# Altium PCB STM32L4雷达LoRa.PcbDoc
Units mil, origin at the board's own origin, x right, y up, seen from the top; angles counter-clockwise.
Board outline 6000 x 4000 mil, 2 copper layers (Top Layer, Bottom Layer); 58 components, 33 nets, 319 pads, 42 vias.
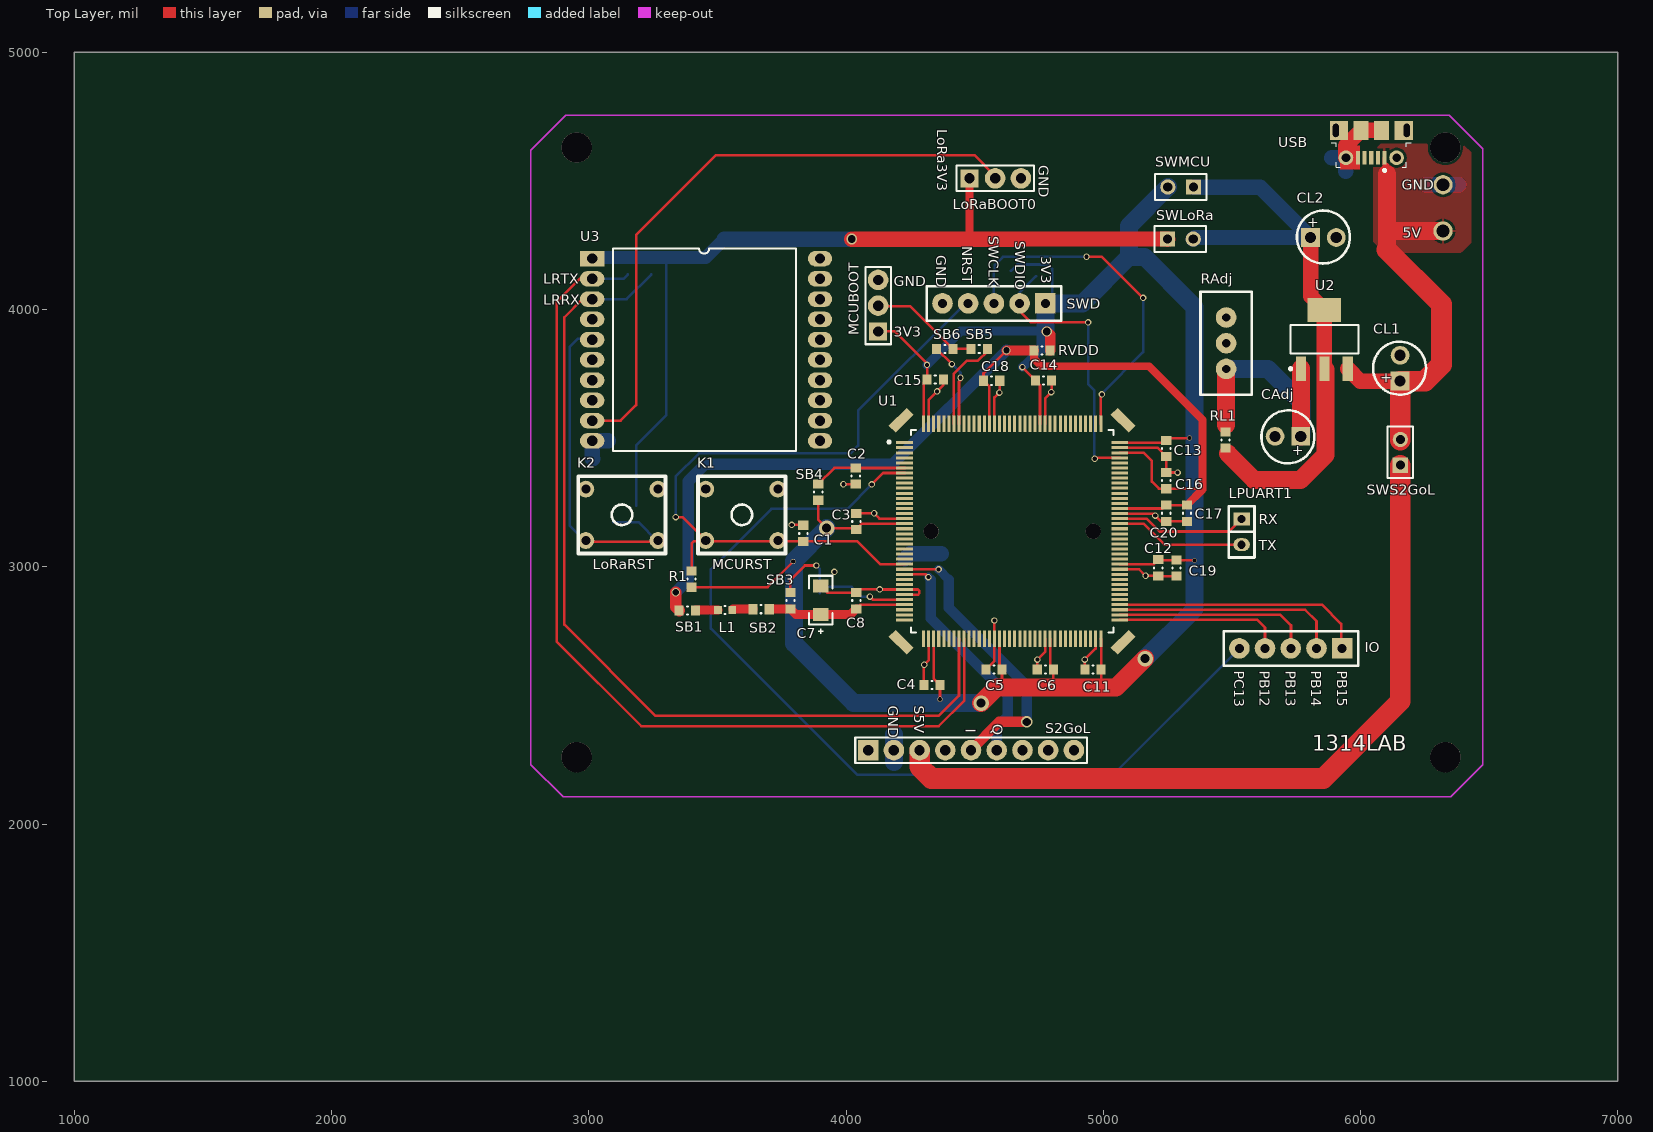
[diagram p0: Top Layer view]
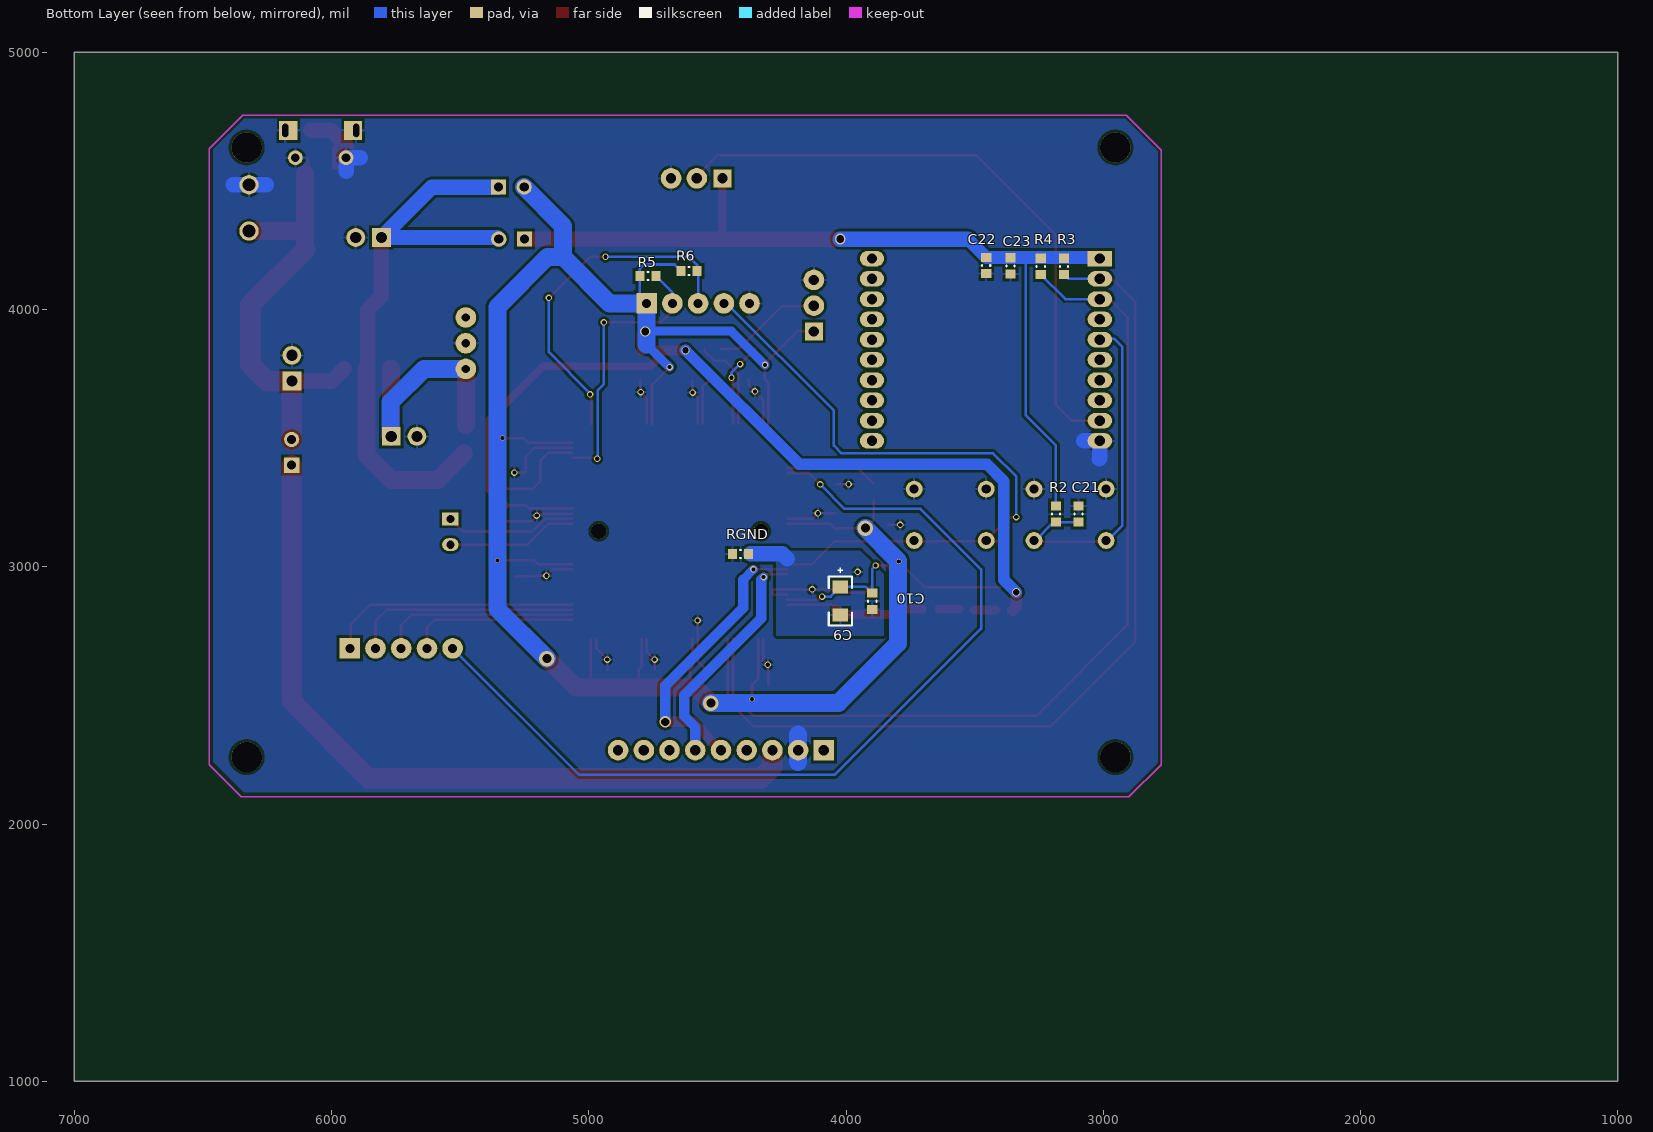
[diagram p1: Bottom Layer view, seen from below]

## Layer stack, top to bottom
Top Layer: signal copper 1.4
Dielectric: dielectric 12.6, FR-4, Dk 4.8
Bottom Layer: signal copper 1.4

## Board outline
1000,1000 7000,1000 7000,5000 1000,5000

## Design rules (kind name [scope] priority, off if disabled: settings)
Clearance [All] p1: gap=10
PolygonConnect [All] p1: connectstyle=Relief reliefconductorwidth=10 reliefentries=4 polygonreliefangle="90 Angle" airgapwidth=10
RoutingVias [All] p1: holewidth=16 width=20 viastyle="Through Hole" minholewidth=15 minwidth=19 maxholewidth=45 maxwidth=60
SolderMaskExpansion [All] p1: expansion=4
Width [All] p1: maxlimit=100 minlimit=10 preferedwidth=10 minimp=50.000000 maximp=50.000000 favimp=50.000000
28 further rules are at their usual default settings.

## Components (designator, comment, footprint, x,y, rotation, side; value= is the part's Value field where it differs from the comment)
C1 "104" 0603C 3834,3130 r270 top
C2 "1uF" 0603C 4038,3353 r90 top
C3 "100nF" 0603C 4040,3176 r270 top
C4 "100nF" 0603C 4334,2541 r0 top
C5 "100nF" 0603C 4575,2600 r0 top
C6 "100nF" 0603C 4775,2600 r0 top
C7 "1uF" TAN-A 3902,2870 r270 top
C8 "100nF" 0603C 4040,2868 r270 top
C9 "1uF" TAN-A 4022,2867 r90 bottom
C10 "100nF" 0603C 3898,2866 r90 bottom
C11 "100nF" 0603C 4960,2600 r0 top
C12 "100nF" 0603C 5214,2996 r90 top
C13 "100nF" 0603C 5245,3460 r90 top
C14 "100nF" 0603C 4768,3724 r180 top
C15 "100nF" 0603C 4347,3728 r180 top
C16 "100nF" 0603C 5245,3335 r270 top
C17 "100nF" 0603C 5325,3208 r90 top
C18 "100nF" 0603C 4566,3723 r180 top
C19 "4.7uF" 0603C 5285,2995 r90 top
C20 "4.7uF" 0603C 5245,3208 r90 top
C21 "104" 0603C 3096,3205 r270 bottom
C22 "4.7uF" 0603C 3455,4171 r90 bottom
C23 "0.1uF" 0603C 3360,4170 r90 bottom
CAdj "10uF" 极性电容 5710,3480 r180 top
CL1 "10uF" 极性电容 6127,3780 r90 top
CL2 "100uF" 极性电容 5864,4307 r0 top
IO "5P" 5P 5729,2683 r270 top
K1 "KRST" 四角按键 3596,3202 r90 top
K2 "KRST" 四角按键 3130,3202 r90 top
L1 "Inductor" Inductor0603L 3530,2832 r180 top
LoRaBOOT0 "Header 3" HDR1X3 4480,4510 r0 top
LPUART1 "2P" SIP2 5538,3186 r270 top (schematic designator UART1)
MCUBOOT "Header 3" HDR1X3 4125,3915 r90 top
R1 "10K" 0603R 3400,2952 r270 top
R2 "10K" 0603R 3184,3205 r90 bottom
R3 "10K" 0603R 3152,4168 r90 bottom
R4 "10K" 0603R 3243,4168 r90 bottom
R5 "10K" 0603R 4770,4130 r0 bottom
R6 "10K" 0603R 4610,4150 r0 bottom
RAdj "电位器" 电位器 5478,3869 r90 top
RGND "0" 0603R 4410,3050 r180 bottom
RL1 "121" 0603R 5475,3493 r270 top
RVDD "0" 0603R 4762,3841 r180 top
S2GoL "Header 9" HDR1X9 4086,2287 r0 top
SB1 "0" 0603R 3383,2830 r0 top
SB2 "0" 0603R 3670,2835 r0 top
SB3 "0" 0603R 3784,2868 r90 top
SB4 "0" 0603R 3892,3290 r90 top
SB5 "0" 0603R 4518,3846 r180 top
SB6 "0" 0603R 4384,3847 r0 top
SWD "5P" 5P 4575,4024 r270 top
SWLoRa "Header 2" HDR1X2 5250,4274 r0 top
SWMCU "Header 2" HDR1X2 5351,4476 r180 top
SWS2GoL "Header 2" HDR1X2 6155,3395 r90 top
U1 "STM32L_LQFP144" STM32L496LQFP144 4646,3138 r270 top
U2 "LM1117" LM1117 5857,3884 r90 top
U3 "RAK811" RAK811Breakout 3013,4198 r0 top
USB "MicroUSB" MicroUSB 6042,4590 r180 top

## Footprints (in the part's own frame and the unit in brackets; to place one, negate y for a bottom-side part, rotate by r counter-clockwise, add the part's x,y. Pads: shape width x height; smd on the part's side, far side on the other; paste and mask are expansions set on the pad)
5P [mil]
  rect 80x80 hole 35: 1(0,200)
  round 80 hole 35: 2(0,100) 3(0,0) 4(0,-100) 5(0,-200)
  silkscreen extent -67,-261 68,262
0603C [mm]
  rect 0.9x1 smd: 1(-0.8,0) 2(0.8,0)
  silkscreen extent -0.05,-0.4 0.05,0.4, body extent -0.87,-0.48 0.88,0.47, height 1
0603R [mm]
  rect 0.9x1 smd: 1(-0.8,0) 2(0.8,0)
  silkscreen extent -0.05,-0.4 0.05,0.4, body extent -0.85,-0.47 0.85,0.47, height 0.6
HDR1X2 [mm] "Connector; Header; 2 Position"
  rect 1.5x1.5 hole 0.9: 1(0,0)
  round 1.5 hole 0.9: 2(2.54,0)
  silkscreen extent -1.27,-1.27 3.81,1.27
HDR1X3 [mil] "Connector; Header; 3 Position"
  rect 70x70 hole 40: 1(0,0)
  round 80 hole 40: 2(100,0) 3(200,0)
  silkscreen extent -50,-50 250,50
HDR1X9 [mil] "Connector; Header; 9 Position"
  rect 80x80 hole 40: 1(0,0)
  round 80 hole 40: 2(100,0) 3(200,0) 4(300,0) 5(400,0) 6(500,0) 7(600,0) 8(700,0) 9(800,0)
  silkscreen extent -50,-50 850,50
Inductor0603L [mil]
  rect 30x30 smd: 1(27.5,0) 2(-27.5,0)
  silkscreen extent -2,-16 2,16, body extent -34,-19 34,19, height 24
LM1117 [mm]
  rect 2.4x1 smd: 1(-2.9,-2.376) 2(-2.9,-0.076) 3(-2.9,2.224)
  rect 2.4x3.3 smd: 2(2.9,-0.076)
  silkscreen extent -3.02,-3.43 1.4,3.4, body extent -1.85,-3.43 1.85,3.27, height 1.8
MicroUSB [mm]
  rect 0.4x1.35 smd: 1(-1.3,0) 2(-0.65,0) 3(0,0) 4(0.65,0) 5(1.3,0)
  round 1.45 hole 0.85: 6(-2.5,0) 11(2.5,0)
  rect 1.8x1.9 hole 0.6 slot 1.3 at 90 deg copper offset 0.3,0: 7(-3.5,-2.7)
  rect 1.5x1.9 smd: 8(-1,-2.7) 9(1,-2.7)
  rect 1.8x1.9 hole 0.6 slot 1.3 at 90 deg copper offset -0.3,0: 10(3.5,-2.7)
  silkscreen extent -3.95,-1.46 3.95,1.37, body extent -4.1,-5.21 4.1,0.19, height 2.58
RAK811Breakout [mil]
  rect 95x60 hole 40: 1(0,0)
  oval 95x60 hole 40: 2(0,-78.74) 3(0,-157.48) 4(0,-236.22) 5(0,-314.96) 6(0,-393.7) 7(0,-472.44) 8(0,-551.18) 9(0,-629.92) 10(0,-708.66) 11(885.83,-708.66) 12(885.83,-629.92) 13(885.83,-551.18) 14(885.83,-472.44) 15(885.83,-393.7) 16(885.83,-314.96) 17(885.83,-236.22) 18(885.83,-157.48) 19(885.83,-78.74) 20(885.83,0)
  silkscreen extent 82,-748 793,39
SIP2 [mil]
  rect 50x64 hole 32: 1(0,0)
  oval 50x64 hole 32: 2(100,0)
  silkscreen extent -50,-50 150,50
STM32L496LQFP144 [mm] "32-bit MCU ARM-based Cortex-M3 20 X 20mm, 0.5mm Pitch, 1.6mm Max thickness"
  rect 1x2.5 smd rot 135: 0(-10.96,10.96) 0(10.96,-10.96)
  rect 1x2.5 smd rot 45: 0(-10.96,-10.96) 0(10.96,10.96)
  round 1.5 hole 1.5 unplated: 0(0,-8) 0(0,8)
  rect 0.3x1.65 smd: 1(-8.75,-10.625) 2(-8.25,-10.625) 3(-7.75,-10.625) 4(-7.25,-10.625) 5(-6.75,-10.625) 6(-6.25,-10.625) 7(-5.75,-10.625) 8(-5.25,-10.625) 9(-4.75,-10.625) 10(-4.25,-10.625) 11(-3.75,-10.625) 12(-3.25,-10.625) 13(-2.75,-10.625) 14(-2.25,-10.625) 15(-1.75,-10.625) 16(-1.25,-10.625) 17(-0.75,-10.625) 18(-0.25,-10.625) 19(0.25,-10.625) 20(0.75,-10.625) 21(1.25,-10.625) 22(1.75,-10.625) 23(2.25,-10.625) 24(2.75,-10.625) 25(3.25,-10.625) 26(3.75,-10.625) 27(4.25,-10.625) 28(4.75,-10.625) 29(5.25,-10.625) 30(5.75,-10.625) 31(6.25,-10.625) 32(6.75,-10.625) 33(7.25,-10.625) 34(7.75,-10.625) 35(8.25,-10.625) 36(8.75,-10.625) 73(8.75,10.625) 74(8.25,10.625) 75(7.75,10.625) 76(7.25,10.625) 77(6.75,10.625) 78(6.25,10.625) 79(5.75,10.625) 80(5.25,10.625) 81(4.75,10.625) 82(4.25,10.625) 83(3.75,10.625) 84(3.25,10.625) 85(2.75,10.625) 86(2.25,10.625) 87(1.75,10.625) 88(1.25,10.625) 89(0.75,10.625) 90(0.25,10.625) 91(-0.25,10.625) 92(-0.75,10.625) 93(-1.25,10.625) 94(-1.75,10.625) 95(-2.25,10.625) 96(-2.75,10.625) 97(-3.25,10.625) 98(-3.75,10.625) 99(-4.25,10.625) 100(-4.75,10.625) 101(-5.25,10.625) 102(-5.75,10.625) 103(-6.25,10.625) 104(-6.75,10.625) 105(-7.25,10.625) 106(-7.75,10.625) 107(-8.25,10.625) 108(-8.75,10.625)
  rect 1.65x0.3 smd: 37(10.625,-8.75) 38(10.625,-8.25) 39(10.625,-7.75) 40(10.625,-7.25) 41(10.625,-6.75) 42(10.625,-6.25) 43(10.625,-5.75) 44(10.625,-5.25) 45(10.625,-4.75) 46(10.625,-4.25) 47(10.625,-3.75) 48(10.625,-3.25) 49(10.625,-2.75) 50(10.625,-2.25) 51(10.625,-1.75) 52(10.625,-1.25) 53(10.625,-0.75) 54(10.625,-0.25) 55(10.625,0.25) 56(10.625,0.75) 57(10.625,1.25) 58(10.625,1.75) 59(10.625,2.25) 60(10.625,2.75) 61(10.625,3.25) 62(10.625,3.75) 63(10.625,4.25) 64(10.625,4.75) 65(10.625,5.25) 66(10.625,5.75) 67(10.625,6.25) 68(10.625,6.75) 69(10.625,7.25) 70(10.625,7.75) 71(10.625,8.25) 72(10.625,8.75) 109(-10.625,8.75) 110(-10.625,8.25) 111(-10.625,7.75) 112(-10.625,7.25) 113(-10.625,6.75) 114(-10.625,6.25) 115(-10.625,5.75) 116(-10.625,5.25) 117(-10.625,4.75) 118(-10.625,4.25) 119(-10.625,3.75) 120(-10.625,3.25) 121(-10.625,2.75) 122(-10.625,2.25) 123(-10.625,1.75) 124(-10.625,1.25) 125(-10.625,0.75) 126(-10.625,0.25) 127(-10.625,-0.25) 128(-10.625,-0.75) 129(-10.625,-1.25) 130(-10.625,-1.75) 131(-10.625,-2.25) 132(-10.625,-2.75) 133(-10.625,-3.25) 134(-10.625,-3.75) 135(-10.625,-4.25) 136(-10.625,-4.75) 137(-10.625,-5.25) 138(-10.625,-5.75) 139(-10.625,-6.25) 140(-10.625,-6.75) 141(-10.625,-7.25) 142(-10.625,-7.75) 143(-10.625,-8.25) 144(-10.625,-8.75)
  silkscreen extent -10,-12.27 10,10, body extent -17.12,-17.12 17.12,17.13, height 14.3
TAN-A [mil]
  rect 50x60 smd: 1(55,0) 2(-55,0)
  silkscreen extent -95,-45 130,45, body extent -47,-35 47,35, height 39
四角按键 [mil]
  round 65.06 hole 35.43: 1(100,141) 1(100,-139) 2(-100,141) 2(-100,-139)
  silkscreen extent -150,-169 150,171
极性电容 [mm]
  rect 1.85x1.85 hole 1.1: 1(-1.473,-0.686)
  round 1.85 hole 1.1: 2(1.067,-0.686)
  silkscreen extent -2.82,-3.25 2.41,1.98
电位器 [mil]
  round 80 hole 32: 1(-100,0) 2(0,0) 3(100,0)
  silkscreen extent -200,-100 200,100

## Part data
C1 C2 C3 C4 C5 C6 C8 C10 C11 C12 C13 C14 C15 C16 C17 C18 C19 C20 C21 C22 C23: library part 贴片电容
C7 C9: library part 贴片钽电容
CAdj CL1 CL2: library part 极性电容
K1 K2: library part 四角按键
LoRaBOOT0 MCUBOOT: "Header, 3-Pin"
R1 R2 R3 R4 R5 R6 RGND RL1 RVDD SB1 SB2 SB3 SB4 SB5 SB6: library part 贴片电阻
S2GoL: "Header, 9-Pin"
SWLoRa SWMCU SWS2GoL: "Header, 2-Pin"
U1: library part STM32L496
U3: library part RAK811Breakout

## Free pads (board coordinates)
  round 118.11 hole 118.11: 0(2953,2260) 0(2953,4630) 0(6330,2260) 0(6330,4630)
  round 75 hole 50: 0(6321,4305) 0(6321,4485)

## Via types
v1: diameter 25, hole 16, Top Layer to Bottom Layer, 30 vias
v2: diameter 20, hole 16, Top Layer to Bottom Layer, 4 vias
v3: diameter 60, hole 35, Top Layer to Bottom Layer, 3 vias
v4: diameter 32, hole 25, Top Layer to Bottom Layer, 2 vias
v5: diameter 45, hole 32, Top Layer to Bottom Layer, 1 vias
v6: diameter 42, hole 30, Top Layer to Bottom Layer, 1 vias
v7: diameter 40, hole 30, Top Layer to Bottom Layer, 1 vias

## Nets (pads, with @x,y where several pads share a name; then routed paths per layer and width w, separated by ;. In a path a pad name is that pad's centre, name@x,y a point inside that pad or via, vN(x,y) a via of type N, cw(c..) or ccw(c..) an arc to the next point about the centre after c; other vN are vias at no path point)
5V: CL1.1 pad.0@6321,4305 SWS2GoL.2 U2.1 USB.1 | length 1748.3
  Top Layer w12: 6082.09,4547.43 6091.46,4556.8 6091.46,4588.28 USB.1
  Top Layer w20: 6099.39,4562.39 6102.44,4559.33 6102.44,4548.44
  Top Layer w60: U2.1 5998.38,3722 CL1.1
  Top Layer w70: 6102.5,4232.5 6102.5,4300 6107.5,4305 ; 6102.5,4526.5 6102.5,4310 6107.5,4305 ; pad.0@6320,4305 6107.5,4305
  Top Layer w80: 6102.5,4232.5 6315,4020 6315,3786 6251,3722 CL1.1 SWS2GoL.2@6154,3492
ADC_I: S2GoL.5 U1.26 | length 1145.1
  Top Layer w10: U1.26 4359.64,2990.36 v1(4360,2990)
  Top Layer w40: S2GoL.5 4596,2397 v5(4703,2397)
  Bottom Layer w35: v1(4360,2990) 4400,2950
  Bottom Layer w40: 4400,2950 4400,2840 4703,2537 v5(4703,2397) ; S2GoL.5@4486,2272 S2GoL.5
ADC_Q: S2GoL.6 U1.27 | length 915.5
  Top Layer w10: U1.27 4309.32,2970.68 v1(4320,2960)
  Bottom Layer w35: v1(4320,2960) 4330,2950
  Bottom Layer w40: 4330,2950 4330,2800 4629,2501 4629,2420 4586,2377 S2GoL.6
AGND: C7.2 C8.1 C9.2 C10.1 RGND.2 U1.30 U1.31 | length 620.5
  Top Layer w10: C7.2 3927.5,2899.5 C8.1 4052.5,2912 v1(4131,2912) 4131.38,2911.62 U1.30 4279.38,2911.62 4285,2906 4285,2897 4279.94,2891.94 U1.31
  Bottom Layer w60: 4228,3031 4247,3050 RGND.2@4371,3050
  other v1: 3955,2980
AVDD: C7.1 C8.2 SB2.2 SB3.1 U1.33 | length 551.3
  Top Layer w10: SB2.2 SB2.2@3703,2836.5 ; C8.2 4056.06,2852.57 U1.33
  Top Layer w35: SB2.2@3703,2836.5 SB3.1 3805.5,2815 C7.1 4018.5,2815 C8.2
GND: C1.1 C2.1 C3.1 C4.1 C5.1 C6.1 C11.1 C12.1 C13.1 C14.1 C15.1 C16.1 C17.1 C18.1 C19.1 C20.1 C21.1 C22.1 C23.1 CAdj.2 CL1.2 CL2.2 K1.1 K2.1 LoRaBOOT0.3 MCUBOOT.3 pad.0@6321,4485 RAdj.2 RGND.1 S2GoL.2 SWD.5 U1.16 U1.38 U1.51 U1.61 U1.71 U1.83 U1.94 U1.107 U1.120 U1.130 U1.143 U3.10 USB.5 USB.6 USB.7 USB.8 USB.9 USB.10 USB.11 | length 2979.4
  Top Layer w10: v1(3789,3163) 3832.5,3163 C1.1 ; v1(3990,3321) 3990.5,3321.5 C2.1 ; C3.1 4108.5,3207.5 v1(4109,3208) 4129.79,3187.21 U1.16 ; C4.1 4302.5,2617.5 v1(4304,2619) 4321.2,2636.2 U1.38 ; U1.143 4321.2,3649.2 4378.5,3706.5 C15.1 ; C5.1 4577.1,2633.6 U1.51 4577,2719.8 v1(4577,2791) ; U1.130 4577.1,3658.1 v1(4596,3677) 4597.5,3678.5 C18.1 ; C6.1 4743.5,2638.5 v1(4744,2639) 4773.95,2668.95 U1.61 ; U1.120 4773.95,3654.95 v1(4798,3679) 4799.5,3680.5 C14.1 ; C11.1 4928,2600.5 v1(4928,2639) 4970.8,2681.8 U1.71 ; U1.83 5139.64,2990.36 v1(5165,2965) 5165.5,2964.5 C12.1 5215,2963.5 C19.1 ; U1.94 5194.1,3206.9 v1(5202,3199) 5224.5,3176.5 C20.1 C17.1 ; U1.107 5210.7,3462.8 C13.1 C16.1 5288.5,3366.5 v1(5289,3366)
  Top Layer w60: USB.11 5943.57,4637.24 ; 5953.42,4647.09 USB.9 USB.8
  Bottom Layer w60: 3015,3420 3013,3422 U3.10 3074.34,3489.34 3075,3490 ; 5888,4589 5889,4590 USB.11 5943.57,4538.57 5943,4538 ; 6253,4486 6254,4485 6383,4485
  Bottom Layer w70: 4186,2241 S2GoL.2 4186,2347
  other v1: 4354,3682
LORA3V3: C22.2 C23.2 LoRaBOOT0.1 R2.2 R3.2 R4.2 SWLoRa.1 U3.1 | length 3516.8
  Top Layer w30: 4478,4274 4480,4276 LoRaBOOT0.1
  Top Layer w60: v6(4022,4274) 4478,4274 4646.78,4274 4646.99,4274.21 5249.79,4274.21 SWLoRa.1
  Bottom Layer w10: U3.1 U3.1@3015,4200 ; R2.2 3184,3472 3302,3590 3302,4202.5
  Bottom Layer w50: U3.1@3017.5,4202.5 3302,4202.5 C22.2 3526.5,4274
  Bottom Layer w60: 3526.5,4274 v6(4022,4274)
LORARST: C21.2 K2.2 R2.1 U3.5 | length 1367
  Top Layer w10: K2.2@2988,3098 K2.2@3268,3098
  Bottom Layer w10: K2.2@2988,3098 2926,3160 2926,3855 2957,3886 3010.04,3886 U3.5 ; C21.2 R2.1 3192.5,3173.5 K2.2@3268,3098
NetCAdj_1: CAdj.1 RAdj.1 RL1.1 U2.3 | length 959.1
  Top Layer w70: 5478,3552 RAdj.1 ; CAdj.1@5769.45,3507 U2.3
  Bottom Layer w70: RAdj.1 5641,3769 5770,3640 5770,3509 CAdj.1
NetCL2_1: CL2.1 RL1.2 SWLoRa.2 SWMCU.1 U2.2 | length 2318.7
  Top Layer w60: CL2.1 5806,4052.17 5860,3998.17 U2.2@5860,3769.83
  Top Layer w70: 5485.5,3439.5 5587,3338 5766.23,3338 5863.42,3435.19 U2.2@5863.42,3766.41
  Bottom Layer w60: SWLoRa.2 5356,4280 CL2.1 5610,4476 SWMCU.1
NetL1_1: L1.1 SB1.2 | length 88.8
  Top Layer w10: SB1.2 SB1.2@3416.5,2832
  Top Layer w35: SB1.2@3416.5,2832 L1.1
NetL1_2: L1.2 SB2.1 | length 82.2
  Top Layer w10: L1.2 L1.2@3560.5,2835
  Top Layer w35: L1.2@3560.5,2835 SB2.1
NetLoRaBOOT0_2: LoRaBOOT0.2 U3.9 | length 2430.4
  Top Layer w10: U3.9 3013.08,3568 3124,3568 3184,3628 3184,4290 3494,4600 4500,4600 4580,4520 LoRaBOOT0.2@4580,4505
NetS2GoL_3: S2GoL.3 SWS2GoL.1 | length 2994.3
  Top Layer w80: S2GoL.3 4286,2223 4332,2177 5855,2177 6155,2477 SWS2GoL.1
NetSB5_1: SB5.1 U1.138 | length 368.7
  Top Layer w10: U1.138 4419.62,3750.62 4470,3801 4513,3801 4549.5,3837.5 SB5.1
NetSB6_1: SB6.1 U1.137 | length 331.4
  Top Layer w10: SB6.1 v1(4411.5,3788) ; U1.137 4439.31,3719.31 4445,3725 v1(4445,3735)
  Bottom Layer w10: v1(4411.5,3788) 4445,3754.5 v1(4445,3735)
NRST: C1.2 K1.2 R1.1 SWD.4 U1.25 | length 2784.3
  Top Layer w10: v1(3338,3193) 3364,3193 K1.2@3455,3102 ; R1.1 3400,3091 3409,3100 3832.5,3100 C1.2 4044.5,3098.5 4133,3010 4227.65,3010 U1.25
  Bottom Layer w10: v1(3338,3193) 3338,3351 3428,3441 4017,3441 4047,3471 4047,3607 4464,4024 SWD.4
PB12: IO.4 U1.73 | length 657.9
  Top Layer w10: U1.73 5599.49,2793.51 5629,2764 IO.4
PB13: IO.3 U1.74 | length 772.2
  Top Layer w10: U1.74 5688.8,2813.2 5730,2772 5730,2684 IO.3
PB14: IO.2 U1.75 | length 888.9
  Top Layer w10: U1.75 5785.12,2832.88 5829,2789 IO.2
PB15: IO.1 U1.76 | length 988.2
  Top Layer w10: U1.76 5850.43,2852.57 5925,2778 5925,2687 IO.1
PC13: IO.5 U1.7 | length 3631.2
  Top Layer w10: v1(4100,3320) 4144.38,3364.38 U1.7
  Bottom Layer w10: v1(4100,3320) 4005,3225 3710,3225 3475,2990 3475,2760 4044,2191 5037,2191 IO.5
PH3-BOOT0: MCUBOOT.2 SB5.2 SB6.2 | length 424.3
  Top Layer w10: MCUBOOT.2@4131,4012 4250.5,4012 SB6.2 4485.5,3847 SB5.2
SWCLK: R6.1 SWD.3 U1.109 | length 1366.7
  Top Layer w10: SWD.3@4570,4029 SWD.3 ; v1(4935,4205) 4995,4205 v1(5155,4045) ; U1.109 4990,3556.8 4990,3665 v1(4995,3670)
  Bottom Layer w10: SWD.3 R6.1@4575,4145 ; R6.1 4578.5,4173.5 4610,4205 v1(4935,4205) ; v1(4995,3670) 4992.5,3672.5 5155,3835 v1(5155,4045)
SWDIO: R5.1 SWD.2 U1.105 | length 1091.7
  Top Layer w10: SWD.2@4679,4028 SWD.2 4675,3994 4719,3950 v1(4941,3950) ; v1(4967,3420) 4970.43,3423.43 U1.105
  Bottom Layer w10: SWD.2 4675,4066.5 R5.1 ; v1(4941,3950) 4941,3709.65 4965.5,3685.15 4965.5,3421.5 v1(4967,3420)
UART1_RX: LPUART1.1 U1.93 | length 514.8
  Top Layer w10: U1.93 5168.79,3187.21 5219,3137 5489,3137 LPUART1.1
UART1_TX: LPUART1.2 U1.92 | length 507.5
  Top Layer w10: U1.92 5156.47,3167.53 5238,3086 LPUART1.2
UART3_RX: R3.1 U1.45 U3.2 | length 3643.5
  Top Layer w10: U3.2 2964.26,4119.26 2875,4030 2875,2710 3205,2380 4360,2380 4458.99,2478.99 U1.45
  Bottom Layer w10: U3.2 3134.76,4119.26 R3.1
UART3_TX: R4.1 U1.44 U3.3 | length 3536.6
  Top Layer w10: U3.3 2975.52,4040.52 2905,3970 2905,2775 3260,2420 4360,2420 4439.31,2499.31 U1.44
  Bottom Layer w10: U3.3 3147.02,4040.52 R4.1
VBAT: C2.2 SB4.2 U1.6 | length 361.4
  Top Layer w10: SB4.2 3955,3384.5 C2.2 ; C2.2@4038.43,3384.06 U1.6
VDD: C16.2 C17.2 C18.2 C20.2 RVDD.2 SB1.1 U1.95 U1.106 U1.131 | length 4256.4
  Top Layer w10: U1.131 4557.42,3700.09 C18.2 4534.5,3751.5 v4(4624,3841) ; U1.95 5232.09,3226.58 C20.2 C17.2 ; U1.106 5157.88,3443.12 5189,3412 5189,3331 5216.5,3303.5 C16.2 5382.99,3303.5 5386,3300.5 ; 5382.5,3344.5 5386,3341
  Top Layer w30: RVDD.2 4730.5,3809.5 4760,3780 5178,3780 5386,3572 5386,3341 5386,3300.5 C17.2
  Top Layer w40: v4(4624,3841) RVDD.2
  Top Layer w45: v4(3338,2901) 3338,2843.5 SB1.1
  Bottom Layer w45: v4(3338,2901) 3387,2950 3387,3333 3452,3398 4181,3398 v4(4624,3841)
VDD_MCU: C3.2 C4.2 C5.2 C6.2 C11.2 C12.2 C13.2 C14.2 C15.2 C19.2 MCUBOOT.1 R1.2 R5.2 R6.2 RVDD.1 SB4.1 SWD.1 SWMCU.2 U1.17 U1.39 U1.52 U1.62 U1.72 U1.84 U1.108 U1.121 U1.144 | length 8763
  Top Layer w10: R1.2 3695.5,2920.5 v2(3795,3020) ; SB4.1 3892,3183 v3(3925,3150) 4034.5,3150 C3.2 4063.02,3167.53 U1.17 ; MCUBOOT.1 4190,3915 4315,3790 v1(4315,3785) 4315.5,3784.5 C15.2 4301.51,3714.01 U1.144 ; U1.39 4340.88,2565.61 C4.2 4365.5,2485.5 v2(4365,2485) ; U1.52 4596.79,2609.71 C5.2 4606.5,2531.5 4605,2530 ; v1@4685.25,3775.25 C14.2 4754.27,3706.24 U1.121 ; v1(4686,3776) v1@4686,3779 ; 4792.99,2530 4806.5,2516.5 ; U1.62 4793.64,2612.86 C6.2 4806.5,2530 ; U1.72 4991.5,2718.68 C11.2 4991.5,2530 ; U1.84 5196.55,3010.05 C12.2 5216.5,3025 v2(5355,3025) ; U1.108 5235.99,3482.49 C13.2 5253.5,3500 v2(5335,3500)
  Top Layer w40: v7(4780,3915) 4793.5,3901.5 RVDD.1
  Top Layer w70: v3(4525,2470) 4585,2530 4605,2530 4792.99,2530 4806.5,2530 4991.5,2530 5050,2530 v3(5163,2643)
  Bottom Layer w10: R6.2 4666.5,4175 4785,4175 4801.5,4158.5 R5.2 4801.5,4050.5 SWD.1
  Bottom Layer w35: v1(4315,3785) 4446,3916 v7@4775,3916 ; v1(4686,3776) 4695,3785 4696,3785 4775,3864
  Bottom Layer w70: v3(3925,3150) 3797.5,3022.5 3797.5,2702.5 4030,2470 v3(4525,2470) ; 4775,3864 v7@4775,3916 ; v7@4775,3930 SWD.1 4919,4024 5100,4205 ; v3(5163,2643) 5355,2835 v2(5355,3025) 5355,4010 5160,4205 5100,4205 ; SWMCU.2 5100,4325 5100,4205
VREF+: C9.1 C10.2 SB3.2 U1.32 | length 654.1
  Top Layer w10: SB3.2 3784,2949 3840,3005 v1(3885,3005) ; v1@4088,2889 v1(4093,2884) 4104.75,2872.25 U1.32
  Bottom Layer w10: v1(3885,3005) 3898,2992 C10.2 3922.5,2922 C9.1 4060,2884 v1(4093,2884)
pads on no net: RAdj.3 S2GoL.1 S2GoL.4 S2GoL.7 S2GoL.8 S2GoL.9 U1.0 U1.1 U1.2 U1.3 U1.4 U1.5 U1.8 U1.9 U1.10 U1.11 U1.12 U1.13 U1.14 U1.15 U1.18 U1.19 U1.20 U1.21 U1.22 U1.23 U1.24 U1.28 U1.29 U1.34 U1.35 U1.36 U1.37 U1.40 U1.41 U1.42 U1.43 U1.46 U1.47 U1.48 U1.49 U1.50 U1.53 U1.54 U1.55 U1.56 U1.57 U1.58 U1.59 U1.60 U1.63 U1.64 U1.65 U1.66 U1.67 U1.68 U1.69 U1.70 U1.77 U1.78 U1.79 U1.80 U1.81 U1.82 U1.85 U1.86 U1.87 U1.88 U1.89 U1.90 U1.91 U1.96 U1.97 U1.98 U1.99 U1.100 U1.101 U1.102 U1.103 U1.104 U1.110 U1.111 U1.112 U1.113 U1.114 U1.115 U1.116 U1.117 U1.118 U1.119 U1.122 U1.123 U1.124 U1.125 U1.126 U1.127 U1.128 U1.129 U1.132 U1.133 U1.134 U1.135 U1.136 U1.139 U1.140 U1.141 U1.142 U3.4 U3.6 U3.7 U3.8 U3.11 U3.12 U3.13 U3.14 U3.15 U3.16 U3.17 U3.18 U3.19 U3.20 USB.2 USB.3 USB.4

## Polygon pours and split planes (outlines as drawn)
AGND on Bottom Layer "AGND" (solid, remove dead copper, pour order 20): 3945,3063 3853,2971 3853,2732 3854,2731 4269,2731 4272,2734 4272,3061 4271,3062
GND on Bottom Layer "GND" (solid, remove dead copper, pour order 22): 2787,4616.56 2916,4746 2919,4746 6336,4746 6457,4624.58 6460,4621.57 6460,2242.41 6342,2124 6281,2124 2902,2124 2788,2238.39
5V on Top Layer "5V" (solid, remove dead copper, pour order 6): 6081,4644 6397,4644 6430,4611 6430,4260 6397,4227 6390,4220 6094,4220 6050,4264 6050,4586 6050,4615 6079,4644

## Keep-outs
Keep-Out Layer:
  lines w5: 2775,2230 2900,2105 6350,2105 6475,2230 6475,4625 6345,4755 6270,4755 2910,4755 2775,4620 2775,2230

## Other copper
Top Layer:
  rectangle net GND: 5920,4544 5998,4638

## Silkscreen, mask and mechanical layers (free items; w line width, h text height)
Top Overlay:
  text "LoRa3V3" at 4355,4700 h40 r270
  text "GND" at 4750,4560 h40 r270
  text "GND" at 6160,4465 h40
  text "SWCLK" at 4555,4285 h40 r270
  text "5V" at 6165,4280 h40
  text "SWDIO" at 4657.5,4265.77 h40 r270
  text "NRST" at 4452.5,4245.2 h40 r270
  text "GND" at 4350,4211.68 h40 r270
  text "3V3" at 4760,4207.49 h40 r270
  text "LRTX" at 2823,4100 h40
  text "GND" at 4185,4090 h40
  text "LRRX" at 2823,4018 h40
  text "3V3" at 4185,3895 h40
  text "RX" at 5605,3165 h40
  text "TX" at 5605,3065 h40
  text "LoRaRST" at 3015,2990 h40
  text "MCURST" at 3480,2990 h40
  text "PC13" at 5509,2596 h40 r270
  text "PB12" at 5609,2596 h40 r270
  text "PB13" at 5709,2596 h40 r270
  text "PB14" at 5809,2596 h40 r270
  text "PB15" at 5909,2596 h40 r270
  text "GND" at 4165,2460 h40 r270
  text "S5V" at 4265,2459.62 h40 r270
  text "Q" at 4570,2388.4 h40 r270
  text "I" at 4466,2370 h40 r270
  text "1314LAB" at 5813,2284 h60

## Text inside footprints (layer, text, board x,y; h text height)
CAdj: Top Overlay "+" at 5780,3468 h40 r180
CL1: Top Overlay "+" at 6117,3711 h40 r90
CL2: Top Overlay "+" at 5793,4320 h40
USB: Mechanical 1 "Board edge" at 5822,4747.66 h40 r180